# Altium PCB Servo CB Upgrade.PcbDoc
Units mm, origin at the board's own origin, x right, y up, seen from the top; angles counter-clockwise.
Board outline 94.74 x 42.16 mm, 2 copper layers (Top Layer, Bottom Layer); 28 components, 20 nets, 146 pads, 21 vias.
Unrouted connection lines stored in the file: 23.
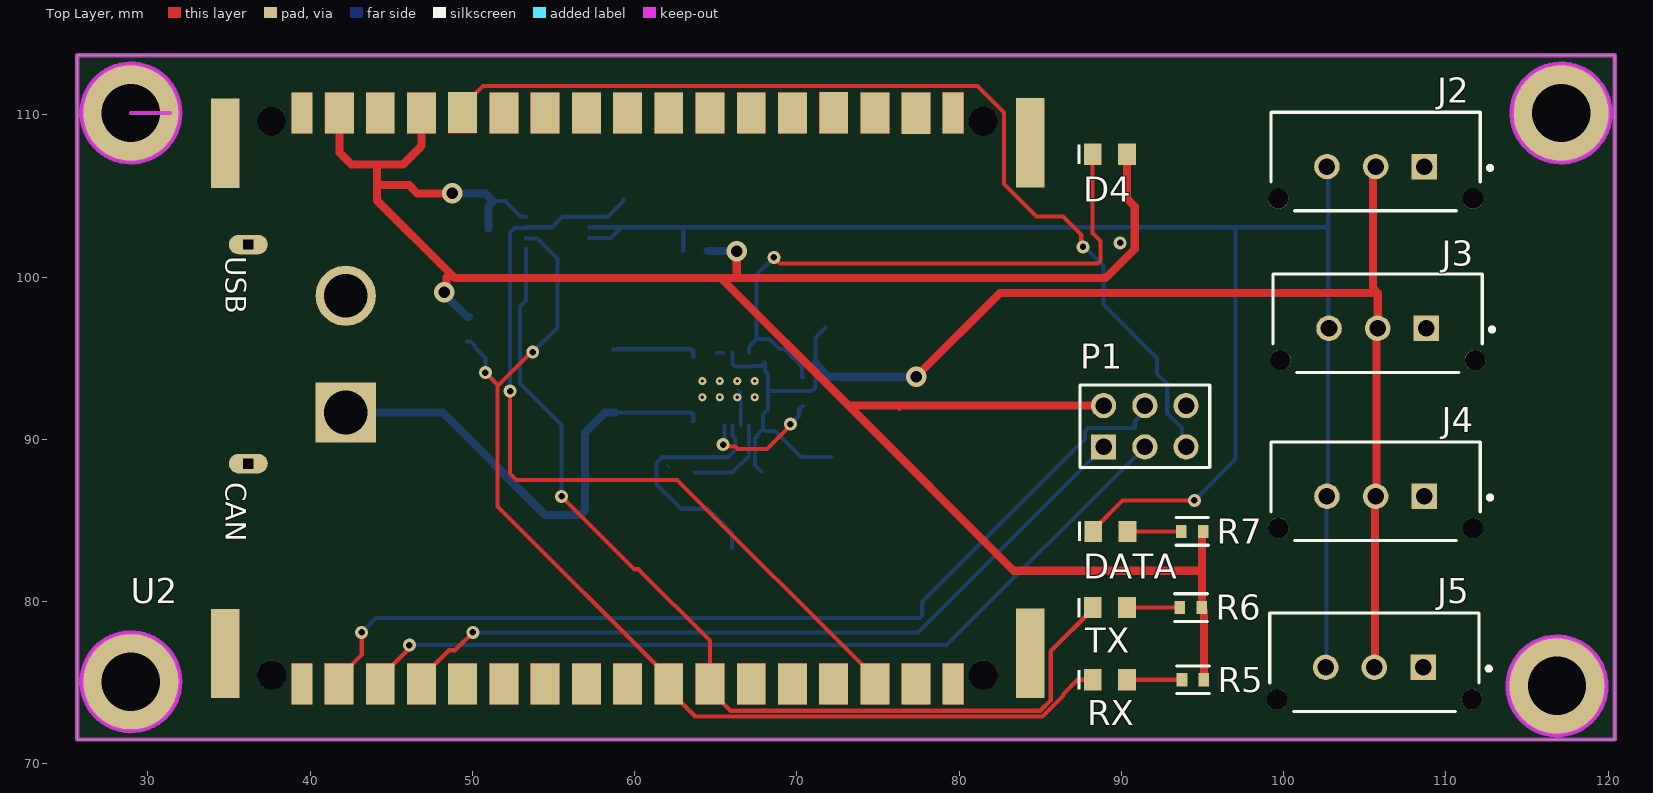
[diagram p0: Top Layer view]
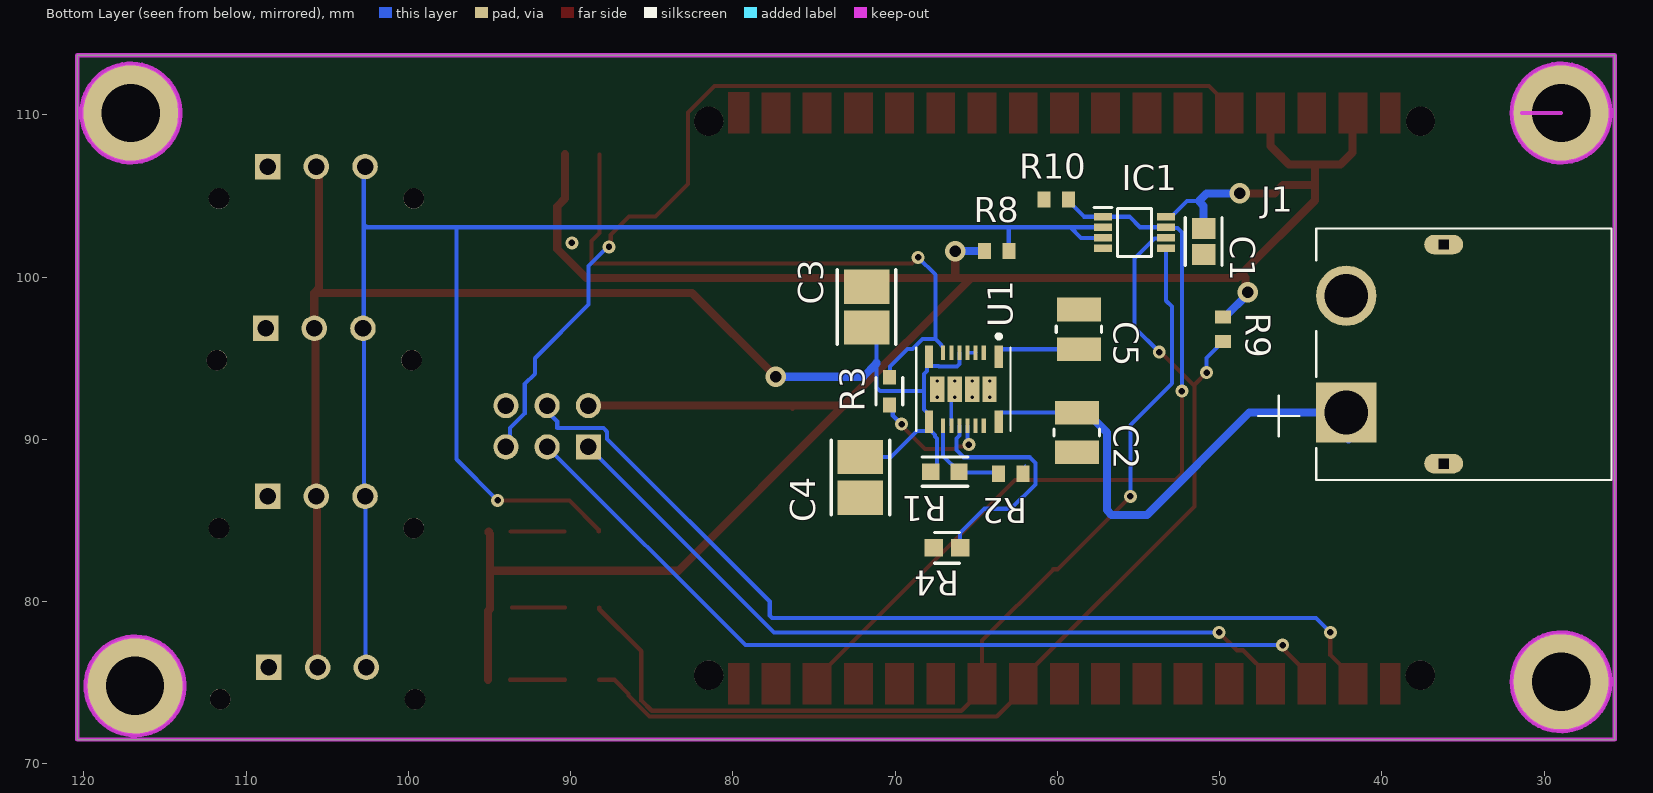
[diagram p1: Bottom Layer view, seen from below]
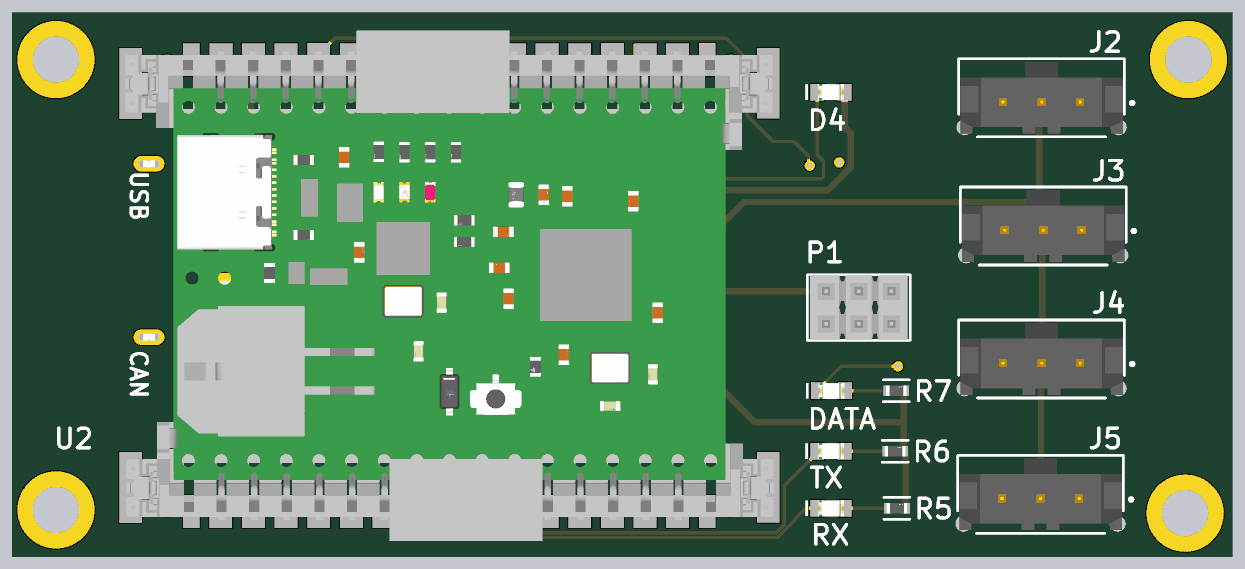
[diagram p2: 3D render of the assembled board from above, using the file's embedded part models]
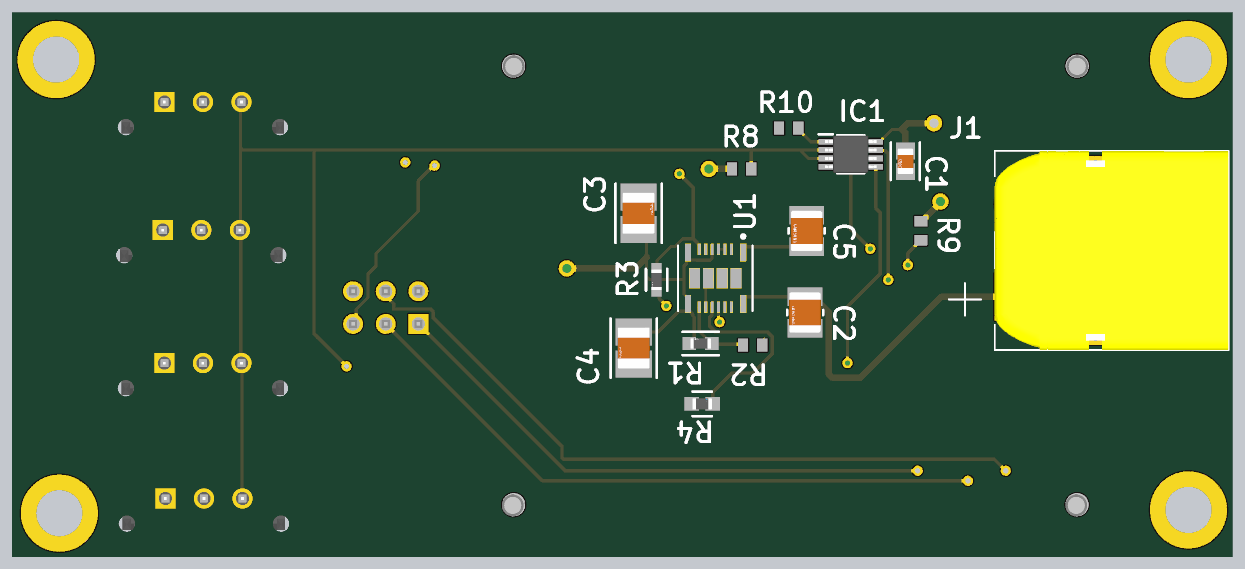
[diagram p3: 3D render of the assembled board from below, using the file's embedded part models]

## Layer stack, top to bottom
Top Solder: solder mask 0.0102, Solder Resist, Dk 3.5
Top Layer: signal copper 0.0356
Dielectric 1: dielectric 0.32, FR-4, Dk 4.8
Bottom Layer: signal copper 0.0356
Bottom Solder: solder mask 0.0102, Solder Resist, Dk 3.5

## Board outline
25.654,71.501 120.396,71.501 120.396,113.665 25.654,113.665

## Design rules (kind name [scope] priority, off if disabled: settings)
Clearance Clearance_1 [OnMid vs OnMid] p1: gap=0.254 ignorepadtopadclearanceinfootprint=FALSE except(0.1: Arc-Arc Arc-Track Arc-Text Track-Track Track-Text Text-Text) sourcerule=36 cellrowname=All cellrowtype=0 cellcolname=All cellcoltype=0 innerlayers=TRUE
Clearance Clearance_2 [(ExistsOnLayer('Top Layer') Or ExistsOnLayer('Bottom Layer')) vs (ExistsOnLayer('Top Layer') Or ExistsOnLayer('Bottom Layer'))] p2: gap=0.254 ignorepadtopadclearanceinfootprint=FALSE except(0.1: Arc-Arc Arc-Track Arc-Text Track-Track Track-Text Text-Text) sourcerule=36 cellrowname=All cellrowtype=0 cellcolname=All cellcoltype=0 outerlayers=TRUE
Clearance [All] p3: gap=0.254 ignorepadtopadclearanceinfootprint=FALSE ismatrix=TRUE
DiffPairsRouting [All] p1: maxlimit=0.5 minlimit=0.1 mostfreqgap=0.25 toplayer_minwidth=0.381 toplayer_maxwidth=0.381 toplayer_prefwidth=0.381 bottomlayer_minwidth=0.381 bottomlayer_maxwidth=0.381 bottomlayer_prefwidth=0.381 maxuncoupledlength=12.7
PolygonConnect [All] p1: connectstyle=Relief reliefconductorwidth=0.254 reliefentries=4 polygonreliefangle="90 Angle" airgapwidth=0.254
RoutingVias [All] p1: holewidth=0.711 width=1.27 viastyle="Through Hole" minholewidth=0.711 minwidth=1.27 maxholewidth=0.711 maxwidth=1.27
SolderMaskExpansion [All] p1: expansion=0.102 istentingtop=FALSE
Width [All] p1: maxlimit=0.5 minlimit=0.1 preferedwidth=0.25 minimp=50.000000 maximp=50.000000 favimp=50.000000
29 further rules are at their usual default settings.

## Components (designator, comment, footprint, x,y, rotation, side; value= is the part's Value field where it differs from the comment)
C1 "100nF" FP-0805-L_2_01_0_2-W_1_25-IPC_B 50.988,102.191 r270 bottom
C2 "10uF" FP-CL32-IPC_C 58.801,90.424 r270 bottom
C3 "47uF" FP-GRM32E-0_3-0_2-IPC_A 71.755,98.152 r90 bottom
C4 "47uF" FP-GRM32E-0_3-0_2-IPC_A 72.136,87.649 r270 bottom
C5 "10uF" FP-CL32-IPC_C 58.674,96.774 r270 bottom
D4 "150080YS75000" WL-SMCW_0805_150080xx75000 89.281,107.569 r0 top
DATA "150080BS75000" WL-SMCW_0805_150080xx75000 89.315,84.328 r0 top (schematic designator D3)
IC1 "74LVC2G241DCTR" SOP65P400X130-8N 55.245,102.743 r180 bottom
J1 "XT60PW-M" AMASS_XT60PW-M 36.195,95.25 r270 bottom
J2 "43650-0328" LIBRARYSOURCE=Vault 105.664,107.122 r0 top
J3 "43650-0328" LIBRARYSOURCE=Vault 105.791,97.155 r0 top
J4 "43650-0328" LIBRARYSOURCE=Vault 105.664,86.802 r0 top
J5 "43650-0328" LIBRARYSOURCE=Vault 105.585,76.261 r0 top
P1 "MTSW-103-07-F-D-244" SMTC-MTSW-103-07-X-D-244 88.9,89.535 r0 top
R1 "110k" FP-AC0603-IPC_A 66.929,88.011 r0 bottom
R2 "10k" RESC1608X55X25ML10T15 62.877,87.884 r0 bottom
R3 "100k" FP-AC0603-MFG 70.358,92.964 r270 bottom
R4 "6,49k" FP-CRCW0603-e3-IPC_A 66.802,83.312 r180 bottom
R5 "1k" FP-RC0603-0_55-IPC_C 94.403,75.184 r0 top
R6 "1k" FP-RC0603-0_55-IPC_C 94.276,79.629 r0 top
R7 "1k" FP-RC0603-0_55-IPC_C 94.361,84.328 r0 top
R8 "10k" RESC1608X55X25ML10T15 63.742,101.6 r0 bottom
R9 "10k" RESC1608X55X25ML10T15 49.784,96.786 r90 bottom
R10 "10k" RESC1608X55X25ML10T15 60.071,104.775 r180 bottom
RX "150080YS75000" WL-SMCW_0805_150080xx75000 89.281,75.184 r0 top (schematic designator D1)
TX "150080YS75000" WL-SMCW_0805_150080xx75000 89.281,79.629 r0 top (schematic designator D2)
U1 "PTPSM63606RDLR" RDL0020A-MFG 65.786,93.091 r270 bottom
U2 "CANduino on 299-017-299198-1 socket" "CANduino on 299-017-299198-1 socket" 59.309,91.948 r180 top

## Footprints (in the part's own frame and the unit in brackets; to place one, negate y for a bottom-side part, rotate by r counter-clockwise, add the part's x,y. Pads: shape width x height; smd on the part's side, far side on the other; paste and mask are expansions set on the pad)
AMASS_XT60PW-M [mm]
  rect 3.716x3.716 / inner round 3.716 / far side rect 3.716x3.716 hole 2.7: 1(3.6,-6)
  round 3.716 hole 2.7: 2(-3.6,-6)
  oval 1.2x2.4 hole 0.6 square: S1(6.75,0) S2(-6.75,0)
  silkscreen extent -7.75,-11.43 7.75,10.35, body extent -7.75,-7.85 7.75,10.35, height 8.4
"CANduino on 299-017-299198-1 socket" [mil]
  rect 50.79x100 smd: 1(780,670) 17(-800,670) 18(-800.11,-714.83) 34(780,-715)
  rect 70.08x100 smd: 2(690,670) 3(590,670) 4(490,670) 5(390,670) 6(290,670) 7(190,670) 8(90,670) 9(-10,670) 10(-110,670) 11(-210,670) 12(-310,670) 13(-410,670) 14(-510,670) 15(-610,670) 16(-710,670) 19(-709.78,-714.61) 20(-610.61,-715.01) 21(-510.24,-715.41) 22(-410,-715) 23(-310,-715) 24(-210,-715) 25(-110,-715) 26(-10,-715) 27(90,-715) 28(190,-715) 29(290,-715) 30(390,-716) 31(490,-715) 32(590,-715) 33(689,-715)
  round 70.87 hole 70.87 unplated: 35(-873,649) 36(-873,-695) 37(854,-695) 38(853.39,649)
  rect 68.9x216.54 smd: MP1(966.54,596.46) MP2(-987.2,595.47) MP3(-987.2,-642.72) MP4(966.54,-641.73)
  Top Layer region: -826.01,619.61 -774.65,619.61 -774.65,720.25 -826.01,720.25
  Top Layer region: -745,619.98 -675,619.98 -675,719.98 -745,719.98
  Top Layer region: -645,619.98 -575,619.98 -575,719.98 -645,719.98
  Top Layer region: -545,619.98 -475,619.98 -475,719.98 -545,719.98
  Top Layer region: -445,619.98 -375,619.98 -375,719.98 -445,719.98
  Top Layer region: -45,619.98 25,619.98 25,719.98 -45,719.98
  Top Layer region: 55,619.98 125,619.98 125,719.98 55,719.98
  Top Layer region: 155,619.98 225,619.98 225,719.98 155,719.98
  Top Layer region: 255,619.98 325,619.98 325,719.98 255,719.98
  Top Layer region: 555,619.98 625,619.98 625,719.98 555,719.98
  Top Layer region: 655,619.98 725,619.98 725,719.98 655,719.98
  Top Layer region: 755,619.98 805.71,619.98 805.71,719.98 755,719.98
  Top Layer region: -345,619.98 -275,619.98 -275,719.98 -345,719.98
  Top Layer region: -245,619.98 -175,619.98 -175,719.98 -245,719.98
  Top Layer region: -145,619.98 -75,619.98 -75,719.98 -145,719.98
  Top Layer region: 355,619.98 425,619.98 425,719.98 355,719.98
  Top Layer region: 455,619.98 525,619.98 525,719.98 455,719.98
  Top Layer region: 755,-765.02 805.71,-765.02 805.71,-665.02 755,-665.02
  Top Layer region: 655,-765.02 725,-765.02 725,-665.02 655,-665.02
  Top Layer region: 555,-765.02 625,-765.02 625,-665.02 555,-665.02
  Top Layer region: 455,-765.02 525,-765.02 525,-665.02 455,-665.02
  Top Layer region: 355,-765.02 425,-765.02 425,-665.02 355,-665.02
  Top Layer region: 255,-765.02 325,-765.02 325,-665.02 255,-665.02
  Top Layer region: 155,-765.02 225,-765.02 225,-665.02 155,-665.02
  Top Layer region: 55,-765.02 125,-765.02 125,-665.02 55,-665.02
  Top Layer region: -45,-765.02 25,-765.02 25,-665.02 -45,-665.02
  Top Layer region: -145,-765.02 -75,-765.02 -75,-665.02 -145,-665.02
  Top Layer region: -245,-765.02 -175,-765.02 -175,-665.02 -245,-665.02
  Top Layer region: -345,-765.02 -275,-765.02 -275,-665.02 -345,-665.02
  Top Layer region: -445,-765.02 -375,-765.02 -375,-665.02 -445,-665.02
  Top Layer region: -545,-765.02 -475,-765.02 -475,-665.02 -545,-665.02
  Top Layer region: -645,-765.02 -575,-765.02 -575,-665.02 -645,-665.02
  Top Layer region: -745,-765.02 -675,-765.02 -675,-665.02 -745,-665.02
  Top Layer region: -826.01,-765.39 -774.65,-765.39 -774.65,-664.75 -826.01,-664.75
  body extent -1004,-804 982,761, height 515
FP-0805-L_2_01_0_2-W_1_25-IPC_B [mm]
  rect 1.305x1.456 smd paste+0 mask+0: 1(-0.806,0) 2(0.806,0)
  silkscreen extent -1.46,-1.13 1.46,1.13, body extent -1,-0.63 1,0.63, height 1.4
FP-AC0603-IPC_A [mm]
  rect 1.059x1.012 smd paste+0 mask+0: 1(-0.877,0) 2(0.877,0)
  silkscreen extent -1.41,-0.91 1.41,0.91, body extent -0.8,-0.4 0.8,0.4, height 0.55
FP-AC0603-MFG [mm]
  rect 0.9x0.8 smd paste+0 mask+0: 1(-0.85,0) 2(0.85,0)
  silkscreen extent -0.85,-0.82 0.85,0.82, body extent -0.8,-0.4 0.8,0.4, height 0.55
FP-CL32-IPC_C [mm]
  rect 1.453x2.704 smd paste+0 mask+0: 1(-1.225,0) 2(1.225,0)
  silkscreen extent -0.2,-1.4 0.2,1.4, body extent -1.6,-1.25 1.6,1.25, height 2.8
FP-CRCW0603-e3-IPC_A [mm]
  rect 1.135x1.062 smd paste+0 mask+0: 1(-0.815,0) 2(0.815,0)
  silkscreen extent -0.75,-0.95 0.75,0.95, body extent -0.77,-0.43 0.77,0.43, height 0.5
FP-GRM32E-0_3-0_2-IPC_A [mm]
  rect 2.103x2.806 smd paste+0 mask+0: 1(-1.251,0) 2(1.251,0)
  silkscreen extent -2.3,-1.8 2.3,1.8, body extent -1.6,-1.25 1.6,1.25, height 2.7
FP-RC0603-0_55-IPC_C [mm]
  rect 0.659x0.812 smd paste+0 mask+0: 1(-0.677,0) 2(0.677,0)
  silkscreen extent -1.01,-0.85 1.01,0.85, body extent -0.8,-0.4 0.8,0.4, height 0.55
LIBRARYSOURCE=Vault [mm]
  rect 1.57x1.57 hole 1.02 paste-2539.97 mask+0: 1(3,-0.315)
  round 1.57 hole 1.02 paste-2539.97 mask+0: 2(0,-0.315) 3(-3,-0.315)
  round 1.27 hole 1.27 unplated paste-2539.97 mask+0: ""(-6,-2.275) ""(6,-2.275)
  silkscreen extent -6.45,-3.04 7.18,3.04, body extent -6.74,-3.14 6.74,3.14, height 0.25
RDL0020A-MFG [mm]
  rect 1.4x0.5 smd paste-0.687 mask+0: 1(-2,2.175) 8(-2,-2.125) 9(2,-2.125) 16(2,2.175)
  rect 0.9x0.25 smd paste-0.437 mask+0: 2(-2.25,1.25) 3(-2.25,0.75) 4(-2.25,0.25) 5(-2.25,-0.25) 6(-2.25,-0.75) 7(-2.25,-1.25) 10(2.25,-1.25) 11(2.25,-0.75) 12(2.25,-0.25) 13(2.25,0.25) 14(2.25,0.75) 15(2.25,1.25)
  rect 1.58x0.875 smd paste-0.777 mask+0: 17(0,1.613) 18(0,0.538) 19(0,-0.538) 20(0,-1.613)
  round 0.5 / inner round 1.524 / far side round 0.5 hole 0.203 paste-2539.97 mask+0: 21(0.5,-0.538) 22(-0.5,-0.538) 23(0.5,0.538) 24(-0.5,0.538) 25(0.5,-1.613) 26(-0.5,-1.613) 27(0.5,1.613) 28(-0.5,1.613)
  silkscreen extent -3.37,-2.9 2.55,2.9
RESC1608X55X25ML10T15 [mm] "Chip Resistor, 2-Leads, Body 1.60x0.80mm, IPC Low Density"
  rect 0.8x1 smd: 1(-0.75,0) 2(0.75,0)
  body extent -0.85,-0.45 0.85,0.45, height 0.55
SMTC-MTSW-103-07-X-D-244 [mm] "Assembly .025\" [.64] SQ Post Terminal Strip, 2x3 Pins, Vertical, 2.54mm Pitch, Male"
  rect 1.55x1.55 hole 1.02: 1(0,0)
  round 1.55 hole 1.02: 2(0,2.54) 3(2.54,0) 4(2.54,2.54) 5(5.08,0) 6(5.08,2.54)
  silkscreen extent -1.46,-1.27 6.54,3.81, body extent -1.27,-1.27 6.35,3.81, height 8.74
SOP65P400X130-8N [mm]
  rect 1.1x0.45 smd: 1(-1.95,0.975) 2(-1.95,0.325) 3(-1.95,-0.325) 4(-1.95,-0.975) 5(1.95,-0.975) 6(1.95,-0.325) 7(1.95,0.325) 8(1.95,0.975)
  silkscreen extent -2.5,-1.48 1.05,1.55, body extent -2.01,-1.48 2.01,1.48, height 0.91
WL-SMCW_0805_150080xx75000 [mm] "SMD Mono-color Chip LED, body 2.0x1.25mm"
  rect 1.1x1.3 smd: 1(-1.05,0) 2(1.05,0)
  silkscreen extent -2,-0.6 -1.8,0.6, body extent -1,-0.63 1,0.62, height 0.7

## Part data
C1: library part CMP-2007-04172-2, "Automotive Ceramic Capacitor, 0805, 100nF, 10%, X7R, 15%, 100V", Case Code (Imperial)=0805, Case Code (Metric)=2012, Dielectric=X7R, Dielectric Material=Ceramic, Max Operating Temperature=125°C, Min Operating Temperature=-55°C, Package Quantity=1, Ratings=AEC-Q200, Tolerance=10%, Voltage=100V, Capacitance=100nF, Case/Package=0805, Construction=Flat, Depth=1.25mm, Height=1.4mm, Lead Free="Lead Free", Length=2.01mm, Mount="Surface Mount", Number of Pins=2, Packaging="Tape and Reel", Radiation Hardening=No, REACH SVHC="No SVHC", RoHS Compliant=Yes, Series=-, Termination=SMD/SMT, Thickness=0.055inch, Voltage Rating=100V, Voltage Rating (DC)=100V, Width=0.049inch
C2 C5: library part CMP-13271-002443-1, "Cap Ceramic 10uF 35V X7R ±10% SMD 1210 +125°C Embossed T/R", Case Code (Imperial)=1210, Case Code (Metric)=3225, Dielectric=X7R, Max Operating Temperature=125°C, Min Operating Temperature=-55°C, Package Quantity=1, Tolerance=10%, Voltage=35V, Capacitance=10uF, Case/Package=1210, Depth=2.5mm, Height=1.8mm, Lead Free="Lead Free", Length=3.2mm, Material=Ceramic, Mount="Surface Mount", Packaging="Tape and Reel", Radiation Hardening=No, Thickness=0.079inch, Voltage Rating=35V, Width=0.098inch
C3 C4: library part CMP-06035-000110-2, "Chip Multilayer Ceramic Capacitors for General Purpose, 1210, 47uF, X6S, 22%, 10%, 16V", Case Code (Imperial)=1210, Case Code (Metric)=3225, Dielectric=X6S, Max Operating Temperature=105°C, Min Operating Temperature=-55°C, Package Quantity=1000, Tolerance=10%, Voltage=16V, Capacitance=47uF, Case/Package=1210, Depth=2.5mm, Height=2.5mm, Lead Free="Lead Free", Length=3.2mm, Material=Ceramic, Mount="Surface Mount", Packaging="Tape and Reel", REACH SVHC="No SVHC", Termination=SMD/SMT, Thickness=0.106inch, Voltage Rating=16V, Voltage Rating (DC)=16V, Weight=0.00388oz, Width=2.5mm
D4 RX TX: library part CMP-1426-00012-3, "2 V Yellow LED 2012 (0805) SMD, Wurth Elektronik WL-SMCW 150080YS75000", Case Code (Imperial)=0805, Case Code (Metric)=2012, Color=Yellow, Forward Current=100mA, Forward Voltage=2V, Max Junction Temperature (Tj)=95°C, Max Operating Temperature=85°C, Max Reverse Voltage (DC)=5V, Min Operating Temperature=-40°C, Power Dissipation=72mW, Test Current=20mA, Case/Package=0805, Dominant Wavelength=590nm, Height=700µm, Length=2mm, Lens Style="Clear, Rectangular", Luminous Intensity=120mcd, Mount="Surface Mount", Packaging="Tape and Reel", Peak Wavelength=595nm, REACH SVHC=Unknown, Reverse Voltage=5V, RoHS=Compliant, Viewing Angle=140°, Wavelength=590nm, Width=1.25mm
DATA: library part CMP-1426-00008-7, "Led, Blue, 470 Nm, 3.2 V, 30 Ma, 145 Mcd Rohs Compliant: Yes", Case Code (Imperial)=0805, Case Code (Metric)=2012, Color=Blue, Forward Current=100mA, Forward Voltage=3.2V, Max Junction Temperature (Tj)=95°C, Max Operating Temperature=85°C, Max Reverse Voltage (DC)=5V, Min Operating Temperature=-40°C, Power Dissipation=105mW, Test Current=20mA, Case/Package=0805, Dominant Wavelength=470nm, Height=700µm, Lead Free="Lead Free", Length=2mm, Lens Style="Clear, Rectangular", Luminous Intensity=145mcd, Mount="Surface Mount", Packaging="Tape and Reel", Peak Wavelength=465nm, REACH SVHC=Unknown, Reverse Voltage=5V, RoHS=Compliant, Viewing Angle=140°, Wavelength=470nm, Width=1.25mm
IC1: "Integrated Circuit", Manufacturer_Name="Texas Instruments", Datasheet Link=https://www.ti.com/lit/gpn/sn74lvc2g241, Height=1.3mm, Manufacturer_Part_Number=74LVC2G241DCTR
J1: "Socket, DC supply, male, PIN: 2", Package=Package, Availability="Not in stock", Check_prices=https://www.snapeda.com/parts/XT60PW-M/AMASS/view-part/?ref=eda, MF=AMASS, MP=XT60PW-M, Price=None, SnapEDA_Link=https://www.snapeda.com/parts/XT60PW-M/AMASS/view-part/?ref=snap
J2 J3 J4 J5: library part CMP-00257-07661218-1, "43650-0328 Connector Header HDR 3 POS 3mm Solder ST Thru-Hole 3 Terminal 1 Port Micro-Fit 3.0 Tray", Current Rating=5A, Manufacturer Lifecycle Status=ACTIVE, Max Operating Temperature=125°C, Min Operating Temperature=-40°C, Voltage Rating=600V, Contact Material="Brass, Gold, Nickel", Contact Plating=Gold, Country of Origin=US, Glow Wire Compliant=Compliant, Halogen Free="Low Halogen", Height=10.15mm, Housing Material=Thermoplastic, Lifecycle Status=Production, Mount="Through Hole", NexarPartId=7661218, Number of Circuits=3, Number of Contacts=3, Number of Positions=3, Number of Rows=1, Orientation=Vertical, Pitch=3mm, Plating=Tin, Radiation Hardening=No, RoHS=Compliant, Schedule B=8536694040, Termination="Through Hole"
P1: library part CMP-1024-00098-1, "Modified .025\" SQ Post Header, Through-hole, Vertical, -55 to 125 degC, 2.54 mm Pitch, 6-Pin, Male, RoHS", Manufacturer=Samtec, Temperature Range="-55 to 125 degC", ComponentLink1Description="Manufacturer URL", ComponentLink1URL=http://www.samtec.com, ComponentLink2Description=Datasheet, ComponentLink2URL=http://www.samtec.com/documents/webfiles/pdf/MTSW.PDF, ComponentLink3Description="Package Specification", ComponentLink3URL=http://www.samtec.com/documents/webfiles/cpdf/MTSW-XXX-XX-X-X-XXXX-XX-XXX-MKT1.pdf, DatasheetVersion=F-214, Mounting Technology=Through-hole, Orientation=Vertical, PackageDescription="Assembly .025\" [.64] SQ Post Terminal Strip", PackageReference=MTSW-103-07-X-D-244, PackageVersion="BI, 2/1987", PartNumber=MTSW-103-07-F-D-244, Pitch="2.54 mm", RoHS=True
R1: library part CMP-03412-026184-2, "RES 110KΩ 1.00% 0.1W 0603", Case Code (Imperial)=0603, Case Code (Metric)=1608, Max Operating Temperature=155°C, Max Power Dissipation=100mW, Min Operating Temperature=-55°C, Resistance=110kR, Resistor Type="Thick Film", Temperature Coefficient=100ppm/°C, Tolerance=1%, Voltage Rating=50V, Case/Package=0603, Features="Moisture Resistant", Height=0.022inch, Length=0.063inch, Number of Terminations=2, Packaging="Tape and Reel", Power Rating=100mW, RoHS Compliant=Yes, Series=AC, Termination=SMD/SMT, Width=0.8mm
R2 R8 R9 R10: library part CMP-2000-05022-1, "Resistor, 10 KOhm, +/- 5%, 100 mW, -55 to 155 degC, 0603 (1608 Metric), RoHS, Tape and Reel", Case Code - in=0603, Case Code - mm=1608, Manufacturer=Yageo, Operating Temperature Range=-55Cto+155C, Package Description="2-Pin Surface Mount Device, Body 1.6 x 0.8 mm", Package Reference=603, Power Rating=100mW, Resistance=10kOhms, Temperature Coefficient=100PPM/C, Tolerance=5%, Voltage Rating=50V, Datasheet URL=http://www.farnell.com/datasheets/443971.pdf, Datasheet Version="Rev. 4, 04/2009", Manufacturer URL=http://www.yageo.com/, Packaging=Reel, Product=ThickFilmResistorsGeneralPurpose, Series=RC, Termination Style=SMD/SMT
R3: library part CMP-2000-04816-3, "RES 100KΩ 1.00% 0.1W 0603", Case Code (Imperial)=0603, Case Code (Metric)=1608, Max Operating Temperature=155°C, Max Power Dissipation=100mW, Min Operating Temperature=-55°C, Package Quantity=1, Ratings=AEC-Q200, Resistance=100kR, Resistor Type="Thick Film", Temperature Coefficient=100ppm/°C, Tolerance=1%, Voltage Rating=50V, Working Voltage=75V, Case/Package=0603, Construction=Rectangular, Depth=0.8mm, Features="Moisture Resistant", Height=0.022inch, Lead Free="Lead Free", Length=1.6mm, Military Standard=Not, Moisture Sensitivity Level=1, Number of Terminations=2, Packaging="Tape and Reel", Power Rating=100mW, RoHS Compliant=Yes, Series=AC, Technology="THICK FILM", Termination=SMD/SMT, Width=0.031inch
R4: library part CMP-2000-03548-2, "RES Thick Film, 6.49kΩ, 1%, 0.1W, 100ppm/°C, 0603", Case Code (Imperial)=0603, Case Code (Metric)=1608, Max Operating Temperature=155°C, Max Power Dissipation=100mW, Min Operating Temperature=-55°C, Package Quantity=10, Resistance=6.49kR, Temperature Coefficient=100ppm/°C, Tolerance=1%, Voltage Rating=75V, Case/Package=0603, Composition="Thick Film", Contact Plating=Tin, Depth=0.85mm, Features="Automotive AEC-Q200", Height=0.45mm, Length=1.55mm, Military Standard=Not, Number of Pins=2, Number of Terminations=2, Packaging="Tape and Reel", Power Rating=100mW, Radiation Hardening=No, Termination=SMD/SMT, Weight=7.1E-05oz, Width=0.033inch
R5 R6 R7: library part CMP-1659-00009-5, "RES 1K OHM 1% 1/10W 0603", Case Code (Imperial)=0603, Case Code (Metric)=1608, Max Operating Temperature=155°C, Max Power Dissipation=100mW, Min Operating Temperature=-55°C, Resistance=1kR, Resistance Tolerance=1%, Resistor Type="Thick Film", Temperature Coefficient=100ppm/°C, Voltage Rating=50V, Case/Package=0603, Construction=Rectangular, Contact Plating=Tin, Depth=0.8mm, Features="Moisture Resistant", Height=0.45mm, Lead Free="Lead Free", Length=1.6mm, Military Standard=Not, Number of Terminations=2, Packaging="Tape and Reel", Power Rating=100mW, Radiation Hardening=No, REACH SVHC="No SVHC", RoHS Compliant=Yes, Series=RC, Size Code=0603, Technology="THICK FILM", Termination=SMD/SMT, Tolerance=1%
U1: "No Description Available", Mfr_Name="Texas Instruments", RefDes=RefDes, TYPE=TYPE
U2: "CANduino board without pins 1, 17, 18 and 34 due to socket specification"

## Via types
v1: diameter 0.8, hole 0.4, Top Layer to Bottom Layer, 13 vias
v2: diameter 1.27, hole 0.711, Top Layer to Bottom Layer, 4 vias
v3: diameter 6, hole 3.6, Top Layer to Bottom Layer, 4 vias

## Nets (pads, with @x,y where several pads share a name; then routed paths per layer and width w, separated by ;. In a path a pad name is that pad's centre, name@x,y a point inside that pad or via, vN(x,y) a via of type N, cw(c..) or ccw(c..) an arc to the next point about the centre after c; other vN are vias at no path point)
+5: C1.1 D4.2 IC1.8 P1.2 R5.2 R6.2 R7.2 R8.2 R9.2 U2.31 U2.33 | length 149
  Top Layer w0.254: 76.327,91.871 76.327,92.075
  Top Layer w0.5: U2.33 41.808,107.671 42.545,106.934 44.133,106.934 ; U2.31 46.863,108.077 45.72,106.934 44.133,106.934 ; v2(48.26,99.06) 48.407,99.207 48.407,99.969 48.641,100.203 ; v2(48.768,105.156) 46.6,105.156 46.092,105.664 44.133,105.664 ; v2(66.294,101.6) 66.294,99.949 ; P1.2 76.327,92.075 73.178,92.075 ; D4.2 90.331,104.846 90.82,104.357 90.82,101.734 89.035,99.949 66.294,99.949 ; R7.2 95.038,84.251 94.952,84.166 94.952,81.897 ; R5.2 95.079,79.425 94.952,79.552 R6.2 94.952,81.897 ; 44.133,105.664 44.133,106.934 ; 44.133,105.664 44.133,104.712 48.641,100.203 ; 48.641,100.203 48.895,99.949 65.304,99.949 ; 65.304,99.949 66.294,99.949 ; 65.304,99.949 73.178,92.075 ; 73.178,92.075 83.355,81.897 94.952,81.897
  Bottom Layer w0.25: 51.28,104.676 52.012,104.676 52.97,103.718 IC1.8
  Bottom Layer w0.5: v2(48.26,99.06) 48.26,98.96 49.684,97.536 R9.2 ; v2(48.768,105.156) 50.8,105.156 51.28,104.676 50.988,104.384 C1.1 ; R8.2 v2(66.294,101.6)
DATA_SERVO: DATA.1 IC1.2 IC1.3 J2.3 J3.3 J4.3 J5.3 R8.1 | length 105.3
  Top Layer w0.254: DATA.1 88.265,84.428 90.07,86.233 v1(94.488,86.233)
  Bottom Layer w0.254: IC1.3 58.532,102.418 59.182,103.068 ; IC1.2 59.182,103.068 ; R8.1 62.992,103.068 ; v1(94.488,86.233) 97.028,88.773 97.028,103.068 ; J5.3 102.625,75.985 102.625,86.448 J4.3 102.728,86.55 102.728,96.776 J3.3 102.743,96.888 102.743,103.251 ; J2.3 102.743,106.728 102.743,103.251 ; 59.182,103.068 62.992,103.068 ; 62.992,103.068 97.028,103.068 ; 97.028,103.068 102.56,103.068 102.743,103.251
GND: C1.2 C2.2 C3.2 C4.2 C5.1 IC1.4 J1.2 J2.1 J3.1 J4.1 J5.1 P1.6 R2.1 R4.1 R10.1 U1.6 U1.11 U1.17 U1.18 U1.19 U1.20 U2.6 U2.29 | length 2.6
  Bottom Layer w0.1: 61.976,88.416 R2.1@62.127,88.265 ; U1.19 U1.19@66.536,92.879
  Bottom Layer w0.2: U1.11 U1.19@66.536,92.879
MOSI: P1.4 U2.2 | length 59
  Top Layer w0.254: U2.2 41.783,75.31 43.18,76.707 v1(43.18,78.105)
  Bottom Layer w0.254: v1(43.18,78.105) 44.069,78.994 77.575,78.994 77.724,79.143 77.724,80.01 87.744,90.03 87.744,90.468 87.967,90.691 90.818,90.691 90.818,91.102 91.44,91.724 P1.4
NetD1_2: R5.1 RX.2 | length 3.4
  Top Layer w0.25: RX.2 R5.1
NetD2_2: R6.1 TX.2 | length 3.3
  Top Layer w0.25: TX.2 R6.1
NetD3_2: DATA.2 R7.1 | length 3.3
  Top Layer w0.254: DATA.2 R7.1
NetD4_1: D4.1 R3.1 U1.7 | length 37.9
  Top Layer w0.1: D4.1@88.211,107.549 D4.1
  Top Layer w0.25: v1(68.58,101.219) 68.961,100.838 88.556,100.838 88.703,100.984 88.703,102.22 88.211,102.711 D4.1@88.211,107.549
  Bottom Layer w0.25: U1.7 67.036,95.666 67.183,95.813 67.183,95.849 67.504,96.17 ; v1(68.58,101.219) 67.504,100.143 67.504,96.17 ; R3.1 70.319,93.853 70.319,94.493 69.24,95.571 68.917,95.571 68.318,96.17 67.504,96.17
NetP1_1: P1.1 U2.4 | length 48.3
  Top Layer w0.254: U2.4 46.863,75.31 48.553,77 48.933,77 v1(50.038,78.105)
  Bottom Layer w0.254: v1(50.038,78.105) 77.47,78.105 P1.1
NetP1_3: P1.3 U2.3 | length 53.5
  Top Layer w0.254: U2.3 44.323,75.31 46.016,77.003 46.016,77.22 v1(46.12,77.324)
  Bottom Layer w0.254: v1(46.12,77.324) 79.229,77.324 P1.3
NetR1_1: R1.1 R2.2 U1.10 | length 5.5
  Bottom Layer w0.25: R2.2@63.691,87.947 R1.1@65.989,87.947 ; R1.1 66.076,88.011 67.036,88.971 U1.10
NetR3_2: R3.2 U1.13 | length 7.6
  Top Layer w0.25: v1(65.449,89.675) 65.554,89.57 66.187,89.57 66.349,89.408 68.149,89.408 69.596,90.855 v1(69.596,90.932)
  Bottom Layer w0.25: v1(65.449,89.675) 65.536,89.762 U1.13 ; v1(69.596,90.932) 70.144,91.48 70.144,91.85 R3.2@70.358,92.064
NetU1_3: U1.3 U1.4 | length 0.5
  Bottom Layer w0.2: U1.3 U1.4
PinDigital: P1.5 U2.30 | length 61.2
  Top Layer w0.254: U2.30 49.403,110.514 50.659,111.771 81.125,111.771 82.764,110.132 82.764,105.729 84.765,103.728 86.391,103.728 87.526,102.593 87.526,101.958 v1(87.63,101.854)
  Bottom Layer w0.254: v1(87.63,101.854) 87.718,101.854 88.9,100.672 88.9,98.298 92.202,94.996 92.202,94.038 92.824,93.416 92.824,91.596 93.732,90.688 93.732,89.783 P1.5
POWER_SERVO: C3.1 C4.1 J2.2 J3.2 J4.2 J5.2 R1.2 U1.5 U1.8 U1.9 | length 90.2
  Top Layer w0.5: v2(77.343,93.853) 82.511,99.021 105.791,99.021 ; J5.2 105.625,75.985 105.625,86.448 J4.2 105.727,86.55 105.727,96.776 J3.2 105.791,99.021 ; J2.2 105.498,106.641 105.498,99.314 105.791,99.021
  Bottom Layer w0.25: U1.5 66.036,94.634 66.182,94.488 67.294,94.488 67.322,94.516 67.786,94.516 U1.8@67.911,94.641 ; R1.2 R1.2 67.423,88.392 67.423,90.061 67.54,90.178 67.54,90.27 U1.9@67.911,90.641 ; U1.8@68.036,94.723 68.036,94.217 68.215,94.038 68.215,92.942 ; 71.137,94.676 71.137,93.207 70.915,92.985 68.259,92.985 68.215,92.942 ; 71.137,94.745 71.137,96.283 C3.1 ; C4.1 70.255,88.9 68.639,90.516 68.036,90.516 U1.9@67.911,90.641 ; U1.9@67.911,90.641 U1.9 67.911,91.541 68.215,91.846 68.215,92.942
  Bottom Layer w0.5: 71.137,94.745 71.137,94.676 71.96,93.853 v2(77.343,93.853)
RT: R4.2 U1.12 | length 14.9
  Bottom Layer w0.25: R4.2 65.987,84.218 64.482,85.723 62.852,85.723 61.348,87.227 61.348,88.541 61.703,88.896 65.772,88.896 66.228,89.352 66.228,90.038 66.036,90.23 U1.12
RX: IC1.6 R9.1 RX.1 U2.10 | length 66.5
  Top Layer w0.254: v1(50.8,94.107) 51.543,93.364 51.543,93.287 ; v1(53.721,95.377) 53.632,95.377 51.543,93.287 ; RX.1 87.3,75.184 86.432,74.316 86.432,74.206 85.144,72.919 63.734,72.919 62.103,74.55 U2.10 62.103,75.31 51.543,85.87 51.543,93.287
  Bottom Layer w0.254: R9.1@49.684,96.036 R9.1 49.884,96.036 50.157,95.763 50.157,95.663 50.8,95.02 v1(50.8,94.107) ; IC1.6 53.339,102.374 54.003,102.374 55.245,101.132 55.245,96.901 v1(53.721,95.377)
TX: IC1.5 TX.1 U2.11 | length 60.9
  Top Layer w0.254: v1(55.499,86.487) 59.996,81.99 60.25,81.99 64.643,77.597 U2.11 64.643,74.55 65.92,73.273 84.997,73.273 85.64,73.915 85.64,76.938 88.231,79.529 TX.1
  Bottom Layer w0.254: IC1.5 53.295,98.539 52.94,98.184 52.94,93.453 55.499,90.894 v1(55.499,86.487)
TX_Enable: IC1.1 IC1.7 R10.2 U2.15 | length 50.8
  Top Layer w0.25: v1(52.324,92.964) 52.324,87.884 52.705,87.503
  Top Layer w0.254: 52.705,87.503 62.61,87.503 74.803,75.31 U2.15
  Bottom Layer w0.25: v1(52.324,92.964) 52.324,102.758 52.588,103.022 53.249,103.022 IC1.7
  Bottom Layer w0.254: IC1.7 54.898,103.068 55.548,103.718 IC1.1 58.364,103.718 59.321,104.675 R10.2
VBAT: C2.1 C5.2 J1.1 U1.1 U1.14 U1.16 | length 35.7
  Bottom Layer w0.254: C5.2 63.488,95.549 63.611,95.426 U1.1 ; C2.1 63.488,91.649 63.611,91.526 U1.16
  Bottom Layer w0.5: J1.1@42.068,89.999 J1.1@42.366,90.297 ; J1.1 48.177,91.65 54.483,85.344 56.652,85.344 56.945,85.637 56.945,90.419 58.175,91.649 C2.1
pads on no net: J1.S1 J1.S2 J2. J3. J4. J5. U1.2 U1.15 U1.21 U1.22 U1.23 U1.24 U1.25 U1.26 U1.27 U1.28 U2.1 U2.5 U2.7 U2.8 U2.9 U2.12 U2.13 U2.14 U2.16 U2.17 U2.18 U2.19 U2.20 U2.21 U2.22 U2.23 U2.24 U2.25 U2.26 U2.27 U2.28 U2.32 U2.34 U2.35 U2.36 U2.37 U2.38 U2.MP1 U2.MP2 U2.MP3 U2.MP4
copper on no net:
  other v1: 89.916,102.108
  other v3: 116.84,74.803 28.956,75.057 28.956,110.109 117.094,110.109

## Keep-outs
Keep-Out Layer:
  circle w0.254: c28.956,75.057 r3.048
  circle w0.254: c116.84,74.803 r3.048
  circle w0.254: c117.094,110.109 r3.048
  circle w0.254: c28.956,110.109 r3.048
  lines w0.254: 28.956,110.109 31.369,110.109 ; 25.654,71.501 120.396,71.501 120.396,113.665 25.654,113.665 25.654,71.501

## Silkscreen, mask and mechanical layers (free items; w line width, h text height)
Board:
  the board outline again, w0.254

## Text inside footprints (layer, text, board x,y; h text height)
U2: Top Overlay "CAN" at 34.803,87.342 h1.27 r270; Top Overlay "USB" at 34.803,101.279 h1.27 r270; Mechanical 1 "USB-PORT" at 40.009,103.126 h1 r270; Mechanical 1 "CAN-PORT" at 39.809,89.147 h1 r270